# EAGLE board spicboard2 (EAGLE 7.3.0)
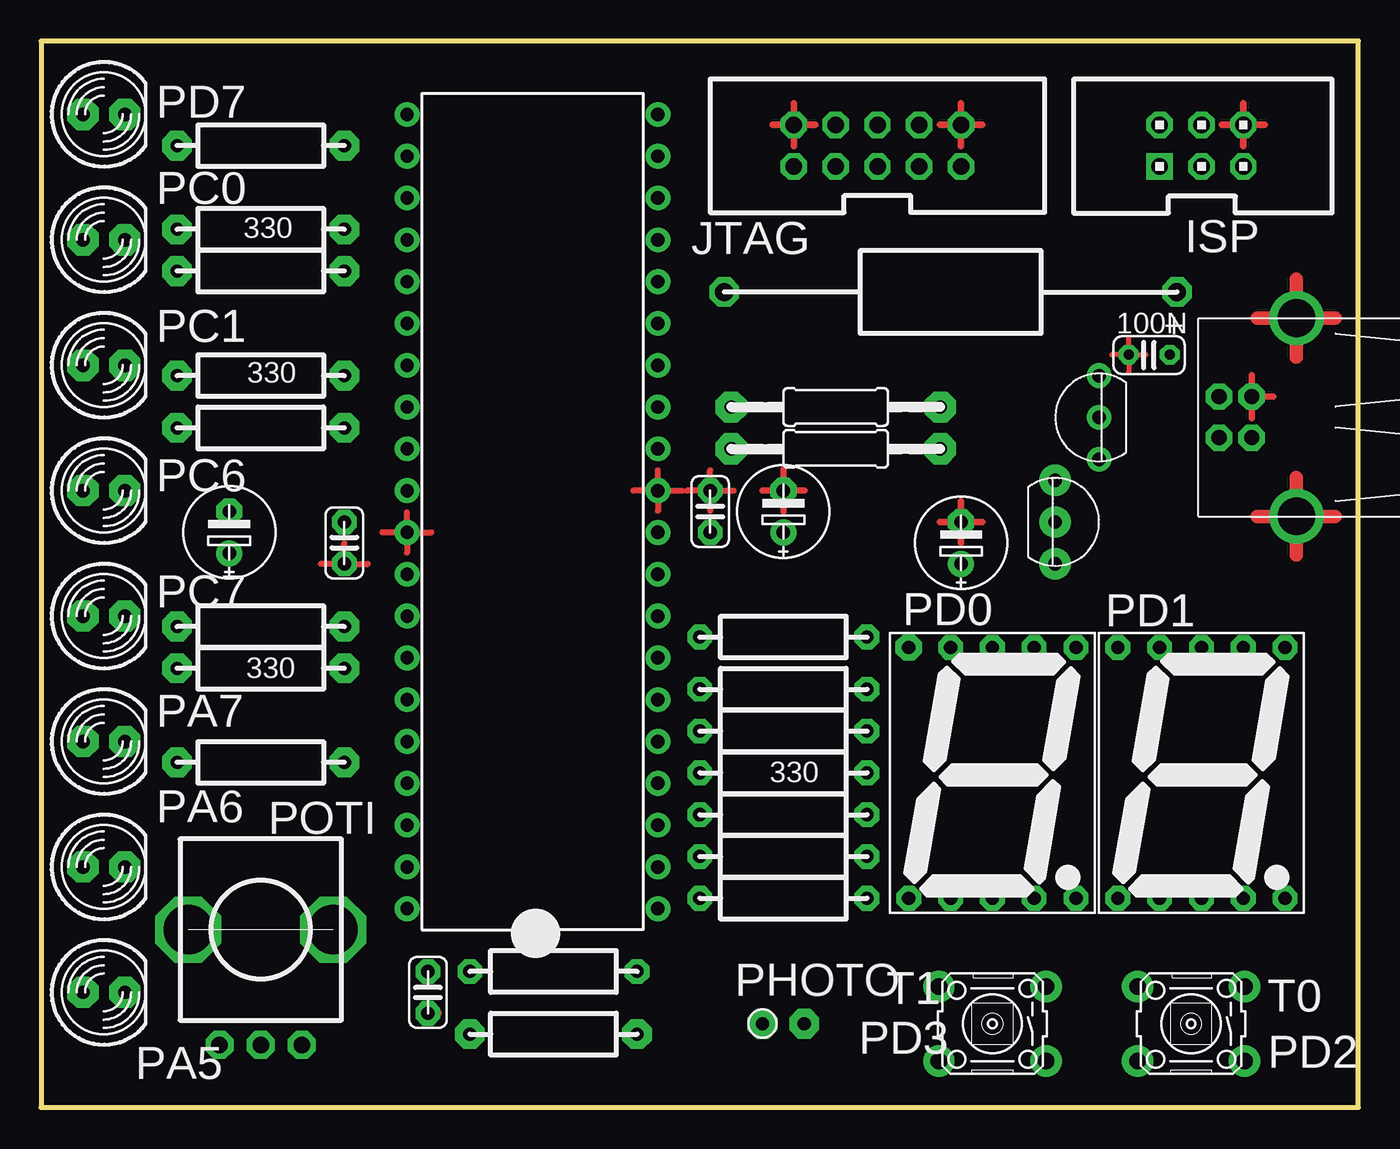
[diagram p0: board, top side]
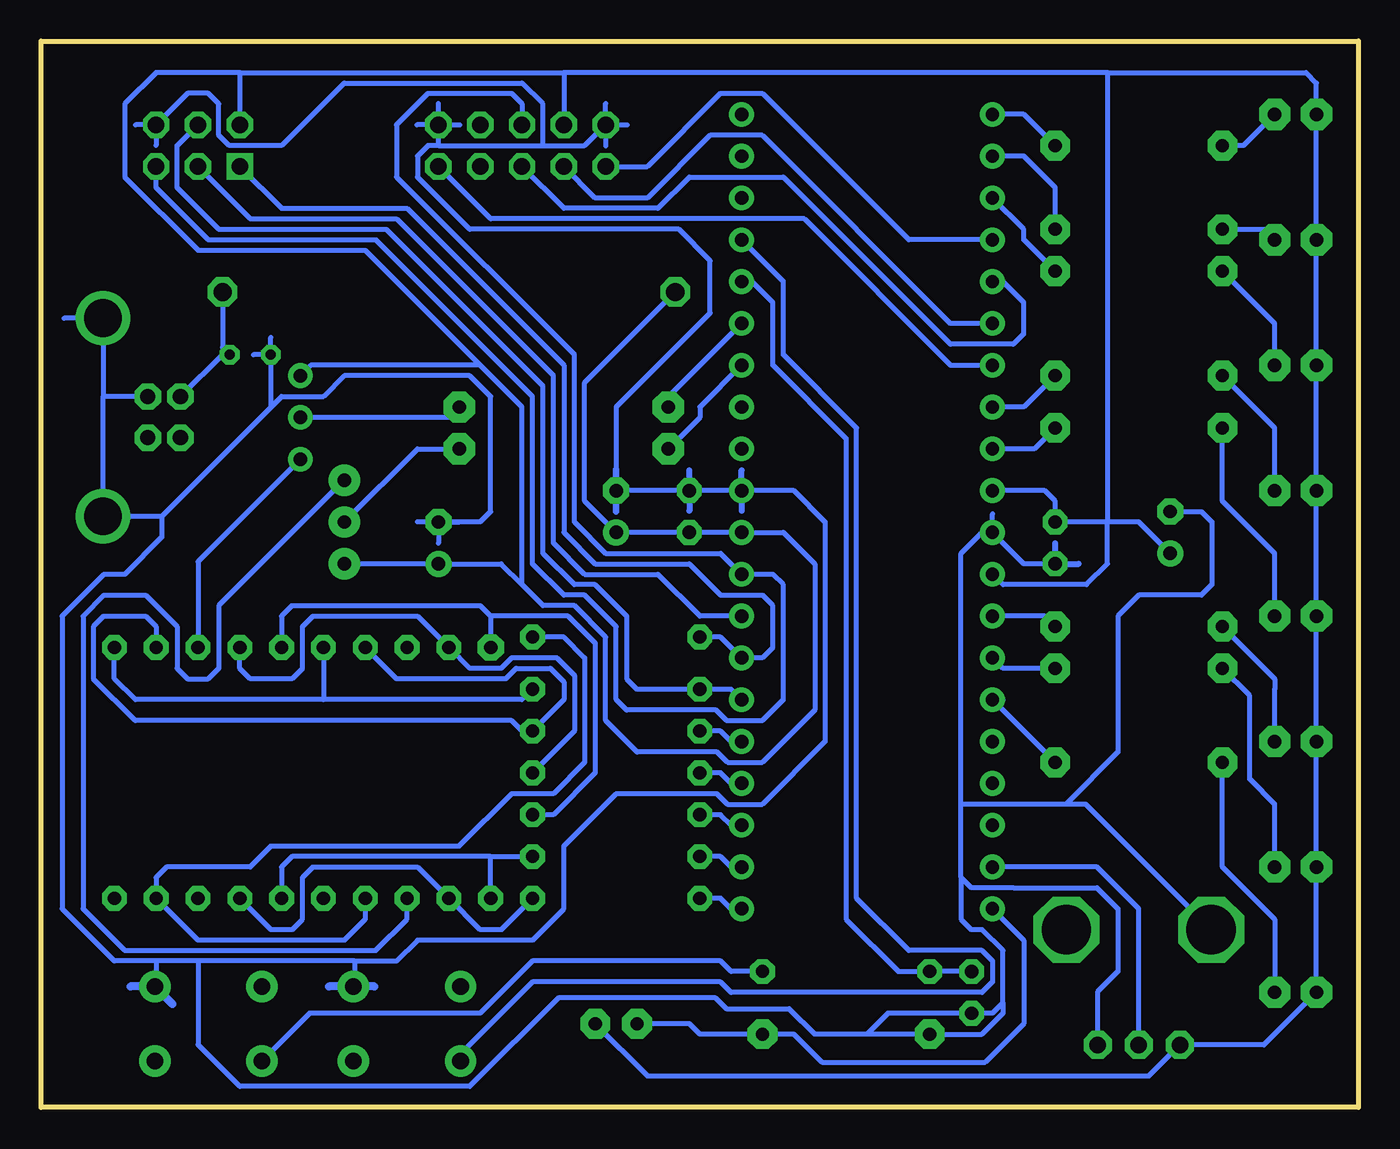
[diagram p1: board, bottom side, seen from below]

Size 80.01 x 64.77 mm. Coordinates in mm from the lower left corner, seen from the top.
Outline: 0,64.77 0,0 80.01,0 80.01,64.77 0,64.77
Copper layers (1*16): Top 0.035mm / dielectric 1.5mm / Bottom 0.035mm
Design rules "TARGET3001!": minimum track width 0.3mm, minimum drill 0.6mm, track to track 0.3mm, track to pad 0.3mm, pad to pad 0.3mm, via to via 0.3mm, smd to smd 0mm, copper to edge 0mm, drill to drill 0.3mm, minimum pad ring 0.3mm, minimum via ring 0.5mm, stop-mask expansion 4mil, vias tented up to drill 0mil, thermal gap 10mil

## Footprints (pad centres in the part's own frame; a part is rotated, then mirrored left to right if it is on the bottom)
#_0 = drill 0.812 pad 1.9 octagon: 1 -1.27,0; 2 1.27,0
#_1 = drill 0.812 pad 1.9 octagon: 1 -1.27,0; 2 1.27,0
#_2 = drill 0.812 pad 1.5 octagon: 1 0,-1.27; 2 0,1.27
D6R2,54_ELKO_66 = drill 0.6 pad 1.2 octagon: 1 1.25,0; 2 -1.25,0
#_3 = drill 0.812 pad 1.574 round: 1 0,-1.27 | drill 0.812 pad 1.574 octagon: 2 0,1.27
#_4 = drill 0.812 pad 1.5 octagon: 1 0,1.27; 2 0,-1.27
#_5 = drill 0.812 pad 1.574 round: 1 0,-1.27 | drill 0.812 pad 1.574 octagon: 2 0,1.27
#_6 = drill 0.812 pad 1.574 round: 1 0,-1.27 | drill 0.812 pad 1.574 octagon: 2 0,1.27
#_7 = drill 0.812 pad 1.5 octagon: 1 0,-1.27; 2 0,1.27
#_8 = drill 0.812 pad 1.5 octagon: 1 -5.08,-7.62; 2 -2.54,-7.62; 3 0,-7.62; 4 2.54,-7.62; 5 5.08,-7.62; 6 5.08,7.62; 7 2.54,7.62; 8 0,7.62; 9 -2.54,7.62 | drill 0.812 pad 1.6 octagon: 10 -5.08,7.62
#_9 = drill 0.812 pad 1.5 octagon: 1 -5.08,-7.62; 2 -2.54,-7.62; 3 0,-7.62; 4 2.54,-7.62; 5 5.08,-7.62; 6 5.08,7.62; 7 2.54,7.62; 8 0,7.62; 9 -2.54,7.62; 10 -5.08,7.62
#_10 = drill 0.812 pad 1.9 octagon: 1 -1.27,0; 2 1.27,0
#_11 = drill 0.812 pad 1.9 octagon: 1 -1.27,0; 2 1.27,0
#_12 = drill 0.812 pad 1.5 round: 1 7.62,-24.13; 2 7.62,-21.59; 3 7.62,-19.05; 4 7.62,-16.51; 5 7.62,-13.97; 6 7.62,-11.43; 7 7.62,-8.89; 8 7.62,-6.35; 9 7.62,-3.81; 10 7.62,-1.27; 11 7.62,1.27; 12 7.62,3.81; 13 7.62,6.35; 14 7.62,8.89; 15 7.62,11.43; 16 7.62,13.97; 17 7.62,16.51; 18 7.62,19.05; 19 7.62,21.59; 20 7.62,24.13; 21 -7.62,24.13; 22 -7.62,21.59; 23 -7.62,19.05; 24 -7.62,16.51; 25 -7.62,13.97; 26 -7.62,11.43; 27 -7.62,8.89; 28 -7.62,6.35; 29 -7.62,3.81; 30 -7.62,1.27; 31 -7.62,-1.27; 32 -7.62,-3.81; 33 -7.62,-6.35; 34 -7.62,-8.89; 35 -7.62,-11.43; 36 -7.62,-13.97; 37 -7.62,-16.51; 38 -7.62,-19.05; 39 -7.62,-21.59; 40 -7.62,-24.13
#_13 = drill 1 pad 1.6 square: 1 -2.54,-1.27 | drill 1 pad 1.6 octagon: 2 -2.54,1.27; 3 0,-1.27; 4 0,1.27; 5 2.54,-1.27; 6 2.54,1.27
#_14 = drill 1 pad 1.6 octagon: 1 -5.08,-1.27; 2 -5.08,1.27; 3 -2.54,-1.27; 4 -2.54,1.27; 5 0,-1.27; 6 0,1.27; 7 2.54,-1.27; 8 2.54,1.27; 9 5.08,-1.27; 10 5.08,1.27
6X19R22,86_61 = drill 1.1 pad 1.8 octagon: 1 13.75,0; 2 -13.75,0
#_15 = drill 0.8 pad 1.8 octagon: 1 0,0; 2 2.54,0
#_16 = drill 0.812 pad 1.9 round: 1 -1.27,0; 2 -1.27,2.54; 3 -1.27,-2.54
#_17 = drill 0.812 pad 1.5 round: 1 1.27,0; 2 1.27,-2.54; 3 1.27,2.54
#_18 = drill 0.8 pad 1.8 octagon: 1 5.08,0; 2 -5.08,0
#_19 = drill 0.8 pad 1.8 octagon: 1 5.08,0; 2 -5.08,0
#_20 = drill 0.8 pad 1.8 octagon: 1 5.08,0; 2 -5.08,0
#_21 = drill 0.8 pad 1.8 octagon: 1 5.08,0; 2 -5.08,0
#_22 = drill 0.8 pad 1.8 octagon: 1 5.08,0; 2 -5.08,0
#_23 = drill 0.8 pad 1.8 octagon: 1 5.08,0; 2 -5.08,0
#_24 = drill 0.8 pad 1.8 octagon: 1 5.08,0; 2 -5.08,0
#_25 = drill 0.8 pad 1.8 octagon: 1 5.08,0; 2 -5.08,0
#_26 = drill 0.8 pad 1.5 octagon: 1 -5.08,0; 2 5.08,0
#_27 = drill 0.8 pad 1.5 octagon: 1 -5.08,0; 2 5.08,0
#_28 = drill 0.8 pad 1.5 octagon: 1 -5.08,0; 2 5.08,0
#_29 = drill 0.8 pad 1.5 octagon: 1 -5.08,0; 2 5.08,0
#_30 = drill 0.8 pad 1.5 octagon: 1 -5.08,0; 2 5.08,0
#_31 = drill 0.8 pad 1.5 octagon: 1 -5.08,0; 2 5.08,0
#_32 = drill 0.8 pad 1.5 octagon: 1 -5.08,0; 2 5.08,0
#_33 = drill 0.812 pad 1.9 octagon: 1 -6.35,0; 2 6.35,0
#_34 = drill 0.812 pad 1.9 octagon: 1 -6.35,0; 2 6.35,0
#_35 = drill 0.8 pad 1.8 octagon: 1 -5.08,0; 2 5.08,0
#_36 = drill 1 pad 1.7 octagon: 1 -2.5,-7; 2 2.5,-7; 3 0,-7 | drill 3 pad 4 octagon: 4 4.4,0; VIA_0 -4.4,0
#_37 = drill 0.8 pad 1.5 octagon: 1 5.08,0; 2 -5.08,0
#_38 = drill 0.812 pad 1.9 octagon: 1 -1.27,0; 2 1.27,0
#_39 = drill 0.812 pad 1.9 octagon: 1 -1.27,0; 2 1.27,0
#_40 = drill 1.016 pad 1.9 round: 1 3.252,-2.261; 2 -3.251,-2.261; 3 3.252,2.26; 4 -3.251,2.26
#_41 = drill 1.016 pad 1.9 round: 1 3.252,-2.261; 2 -3.251,-2.261; 3 3.252,2.26; 4 -3.251,2.26
#_42 = drill 0.914 pad 1.6 octagon: 1 0,-1.25; 2 -1.982,-1.25; 3 0,1.25; 6 -1.982,1.25 | drill 2.286 pad 3.302 round: 4 2.717,-6.02; 5 2.717,6.019
#_43 = drill 0.812 pad 1.9 octagon: 1 -1.27,0; 2 1.27,0
#_44 = drill 0.812 pad 1.9 octagon: 1 -1.27,0; 2 1.27,0

## Placement (x,y rotation side)
BLUE0  #  [#_0]  3.81,37.47 0 top
BLUE1  #  [#_1]  3.81,6.99 0 top
C1  100N  [#_2]  40.64,36.2 0 top
C2  10µF  [D6R2,54_ELKO_66]  67.31,45.72 0 top
C4  10u  [#_3]  11.43,34.92 0 top
C5  100N  [#_4]  23.49,6.99 0 top
C6  10u  [#_5]  45.09,36.2 0 top
C7  10u  [#_6]  55.88,34.29 0 top
C8  100N  [#_7]  18.41,34.29 0 top
DIS1  HD-H101  [#_8]  57.78,20.32 0 top
DIS2  HD-H101  [#_9]  70.48,20.32 0 top
GREEN0  #  [#_10]  3.81,45.09 0 top
GREEN1  #  [#_11]  3.81,14.61 0 top
IC1  MEGA32-P  [#_12]  29.84,36.2 0 top
JP1  AVR-ISP-6  [#_13]  70.48,58.42 0 top
JP2  AVR-JTAG-10  [#_14]  50.8,58.42 0 top
L1  B82132-A5202-M  [6X19R22,86_61]  55.24,49.53 0 top
LDR0  #  [#_15]  43.81,5.08 0 top
Q1  BC557  [#_16]  62.86,35.56 0 top
Q2  BC557  [#_17]  62.99,41.91 0 top
R1  330  [#_18]  13.33,29.21 0 top
R2  330  [#_19]  13.33,26.67 0 top
R3  330  [#_20]  13.33,20.95 0 top
R4  330  [#_21]  13.33,41.28 0 top
R5  330  [#_22]  13.33,44.45 0 top
R6  330  [#_23]  13.33,50.8 0 top
R7  330  [#_24]  13.33,53.34 0 top
R8  330  [#_25]  13.33,58.42 0 top
R9  330  [#_26]  45.09,28.58 0 top
R10  330  [#_27]  45.09,25.4 0 top
R11  330  [#_28]  45.09,22.86 0 top
R12  330  [#_29]  45.09,20.32 0 top
R13  330  [#_30]  45.09,17.78 0 top
R14  330  [#_31]  45.09,15.24 0 top
R15  330  [#_32]  45.09,12.7 0 top
R16  1k  [#_33]  48.26,40 0 top
R17  1k  [#_34]  48.26,42.55 0 top
R18  49,9k  [#_35]  31.12,4.45 0 top
R19  PC16S  [#_36]  13.33,10.79 0 top
R21  1k  [#_37]  31.12,8.26 0 top
RED0  #  [#_38]  3.81,60.33 0 top
RED1  #  [#_39]  3.81,29.84 0 top
S1  #  [#_40]  57.78,5.08 0 top
S2  #  [#_41]  69.85,5.08 0 top
USB1  USB-B-H  [#_42]  73.53,41.93 0 top
YELLOW0  #  [#_43]  3.81,52.7 0 top
YELLOW1  #  [#_44]  3.81,22.23 0 top

## Library data of the parts
BLUE0 BLUE1 C1 C2 C4-C8 DIS1 DIS2 GREEN0 GREEN1 IC1 JP1 JP2 L1 LDR0 Q1 Q2 R1-R19 R21 RED0 RED1 S1 S2 USB1 YELLOW0 YELLOW1 = TARGET3001!_V18.4.0.4

## Nets
(INT0)PD2: R21.1 S2.2
GND: C1.2 C2.2 C4.2 C5.2 C6.2 C7.2 C8.1 IC1.11 IC1.31 JP1.6 JP2.2 JP2.10 R18.1 R19.2 S1.3 S2.3 USB1.3 USB1.4 USB1.5
N$1: IC1.40 LDR0.1 R18.2
N$2: R1.2 YELLOW1.2
N$3: GREEN1.2 R2.2
N$4: BLUE1.2 R3.2
N$5: R4.2 RED1.2
N$6: BLUE0.2 R5.2
N$7: GREEN0.2 R6.2
N$8: R7.2 YELLOW0.2
N$9: R8.2 RED0.2
N$10: IC1.7 JP1.1 R9.1
N$11: IC1.6 JP1.4 R10.1
N$12: IC1.5 R11.1
N$13: IC1.4 R12.1
N$14: IC1.3 R13.1
N$15: IC1.2 R14.1
N$16: IC1.1 R15.1
N$17: IC1.33 R1.1
N$18: IC1.34 R2.1
N$19: IC1.35 R3.1
N$20: IC1.29 R4.1
N$21: IC1.28 R5.1
N$22: IC1.27 JP2.9
N$23: IC1.26 JP2.3
N$24: IC1.25 JP2.5
N$25: DIS1.7 DIS2.7 R11.2
N$26: DIS1.6 DIS2.6 R10.2
N$27: DIS1.4 DIS2.4 R9.2
N$28: DIS1.2 DIS2.2 R15.2
N$29: DIS1.1 DIS2.1 R14.2
N$30: IC1.24 JP2.1
N$31: DIS1.10 DIS2.10 R13.2
N$34: IC1.14 R16.1
N$35: IC1.15 R17.1
N$36: Q1.1 R16.2
N$37: Q2.1 R17.2
N$38: IC1.21 R8.1
N$39: IC1.17 S1.2
N$40: IC1.39 R19.3
N$41: DIS1.9 DIS2.9 R12.2
N$42: IC1.8 JP1.3
N$43: C5.1 IC1.16 R21.2
N$44: IC1.9 JP1.5 JP2.6
N$46: IC1.22 R7.1
N$47: IC1.23 R6.1
Sig$47: DIS1.3 Q1.2
Sig$48: DIS2.8 Q2.2
VBUS: C2.1 L1.1 USB1.6
VCC: BLUE0.1 BLUE1.1 C1.1 C4.1 C6.1 C7.1 C8.2 GREEN0.1 GREEN1.1 IC1.10 IC1.30 IC1.32 JP1.2 JP2.4 L1.2 LDR0.2 Q1.3 Q2.3 R19.1 RED0.1 RED1.1 YELLOW0.1 YELLOW1.1

## Tracks (layer width: path | path; a pad name or v marks a point on that pad's centre or on a via)
(INT0)PD2
  Bottom 0.3: S2.2 63.7,5.71 53.34,5.71 50.16,8.89 38.73,8.89 38.1,8.26 R21.1
GND
  Top 0.3: C2.2 67.11,45.72 | C2.2 66.06,46.77 | C2.2 65.01,45.72 | C2.2 66.06,44.67
  Top 0.375: C1.2 42.08,37.47 | C1.2 40.64,38.7 | C1.2 39.2,37.47 | C1.2 40.64,36.23 | C5.2 24.16,5.71 | C8.1 19.85,33.02 | C8.1 18.41,34.26 | C8.1 16.98,33.02 | IC1.31 23.71,34.92 | IC1.31 22.23,36.16 | IC1.31 20.74,34.92 | IC1.31 22.23,33.69 | IC1.11 38.95,37.47 | IC1.11 37.46,38.7 | IC1.11 35.98,37.47 | IC1.11 37.46,36.23
  Top 0.394: C6.2 46.37,37.47 | C6.2 45.09,38.75 | C6.2 43.8,37.47 | C6.2 45.09,36.18 | C7.2 57.16,35.56 | C7.2 55.88,36.84 | C7.2 54.6,35.56 | C7.2 55.88,34.28
  Top 0.4: USB1.3 74.83,43.18 | USB1.3 73.53,44.48 | USB1.3 73.53,41.88 | JP1.6 74.33,59.69 | JP1.6 73.03,60.99 | JP1.6 71.72,59.69 | JP1.6 73.03,58.39 | JP2.2 47.02,59.69 | JP2.2 45.72,60.99 | JP2.2 44.42,59.69 | JP2.2 45.72,58.39 | JP2.10 57.18,59.69 | JP2.10 55.88,60.99 | JP2.10 54.58,59.69 | JP2.10 55.88,58.39
  Top 0.425: R18.1 26.58,4.45
  Top 0.475: S1.3 61.25,7.34 | S2.3 73.32,7.34
  Top 0.826: USB1.4 78.61,35.91 | USB1.4 76.25,38.27 | USB1.4 73.89,35.91 | USB1.4 76.25,33.54 | USB1.5 78.61,47.95 | USB1.5 76.25,50.31 | USB1.5 73.89,47.95 | USB1.5 76.25,45.58
  Bottom 0.3: C8.1 20.32,33.02 IC1.31 | IC1.31 22.86,34.92 24.13,33.66 24.13,18.41 | USB1.3 76.25,43.18 | USB1.3 73.66,43.18 USB1.3 | 76.25,43.18 USB1.5 78.61,47.95 | 66.04,42.55 65.41,43.18 62.86,43.18 61.59,44.45 53.97,44.45 52.7,43.18 52.7,36.2 53.34,35.56 C7.2 | JP2.2 46.99,58.42 49.53,58.42 | 55.88,58.42 49.53,58.42 | 55.88,58.42 JP2.10 | JP1.6 71.12,61.59 69.85,61.59 69.22,60.96 69.22,59.06 68.58,58.42 65.41,58.42 61.59,62.23 50.8,62.23 49.53,60.96 49.53,58.42 | 60.96,8.89 70.48,8.89 | C7.2 57.16,35.56 | C7.2 54.6,35.56 | C7.2 55.88,34.28 | IC1.31 22.23,36.05 | JP1.6 74.28,59.69 | JP1.6 73.03,58.44 | JP2.2 45.72,60.99 | JP2.2 44.42,59.69 | JP2.2 45.72,58.39 | JP2.10 57.18,59.69 | JP2.10 55.88,60.99 | JP2.10 54.58,59.69 | 55.88,58.42 56.52,58.42 57.15,57.78 57.15,56.52 53.97,53.34 41.27,53.34 39.37,51.44 39.37,48.26 45.09,42.55 C6.2 C1.2 IC1.11 34.29,37.47 32.38,35.56 32.38,22.23 36.2,18.41 38.33,18.41 38.97,19.05 45.09,19.05 48.26,15.88 48.26,12.07 50.16,10.16 57.15,10.16 58.42,8.89 60.96,8.89 | 66.04,42.55 66.04,45.7 C2.2 | 73.03,8.89 73.03,7.42 S2.3 | 60.96,8.89 60.96,7.42 S1.3 | 24.13,13.97 24.13,18.41 | 24.13,13.97 23.49,13.34 20.95,13.34 15.88,13.34 14.6,12.07 14.6,8.26 15.85,7.01 15.85,3.81 R19.2 | 17.78,18.41 14.6,21.59 14.6,29.84 13.33,31.12 9.53,31.12 8.89,31.75 8.89,35.56 9.53,36.2 C4.2 | 17.78,18.41 24.13,18.41 | 66.04,42.55 72.68,35.91 | 72.68,35.91 USB1.4 76.25,43.18 | 73.03,8.89 75.56,8.89 78.74,12.07 78.74,29.84 76.2,32.39 74.93,32.39 72.68,34.64 72.68,35.91 | 70.48,8.89 70.48,3.81 67.94,1.27 53.97,1.27 48.59,6.65 39.04,6.65 38.38,6 34.57,6 33.02,4.45 29.84,4.45 | 70.48,8.89 73.03,8.89
  Bottom 0.3: 24.13,13.97 24.13,11.43 23.49,10.79 22.86,10.79 21.59,9.53 21.59,6.35 | 8.94,10.79 16.55,18.41 17.78,18.41 | C2.2 67.11,45.72 | C2.2 66.06,46.77 | 21.59,6.35 22.23,5.71 C5.2 28.57,5.71 29.84,4.45 | 29.84,4.45 R18.1 22.86,4.45 21.59,5.71 21.59,6.35
  Bottom 0.375: 40.64,38.7 C1.2 40.64,36.23 | 18.41,34.26 C8.1 16.98,33.02 | 37.46,38.7 IC1.11 37.46,36.23
  Bottom 0.394: 45.09,38.75 C6.2 45.09,36.18
  Bottom 0.475: 74.59,7.34 S2.3 72.05,6.29 | 59.77,7.34 S1.3 62.52,7.34
N$1
  Bottom 0.3: IC1.40 20.32,10.16 20.32,5.08 22.66,2.74 32.59,2.74 34.29,4.45 R18.2 39.37,4.45 40,4.45 40.64,5.08 LDR0.1
N$2
  Bottom 0.3: YELLOW1.2 5.08,25.4 5.08,26.04 5.72,26.67 R1.2
N$3
  Bottom 0.3: GREEN1.2 5.08,18.41 6.6,19.94 6.6,23.75 6.6,25.02 R2.2
N$4
  Bottom 0.3: BLUE1.2 5.08,11.43 8.25,14.61 R3.2
N$5
  Bottom 0.3: RED1.2 5.08,33.66 8.25,36.83 R4.2
N$6
  Bottom 0.3: BLUE0.2 5.08,41.28 R5.2
N$7
  Bottom 0.3: GREEN0.2 5.08,47.62 R6.2
N$8
  Bottom 0.3: R7.2 6.35,53.34 5.72,53.34 YELLOW0.2
N$9
  Bottom 0.3: RED0.2 6.98,58.42 R8.2
N$10
  Bottom 0.3: JP1.1 65.41,54.61 57.78,54.61 48.26,45.09 48.26,34.92 46.36,33.02 40.64,33.02 38.73,31.12 36.2,31.12 35.56,30.48 35.56,27.94 36.2,27.3 IC1.7 38.73,28.58 R9.1
N$11
  Bottom 0.3: JP1.4 71.75,58.42 71.75,55.88 69.22,53.34 59.05,53.34 49.53,43.81 49.53,33.66 47.62,31.75 46.36,31.75 44.45,29.84 44.45,26.04 43.81,25.4 R10.1 38.1,25.4 IC1.6
N$12
  Bottom 0.3: IC1.5 38.1,22.23 38.73,22.86 R11.1
N$13
  Bottom 0.3: IC1.4 38.1,19.69 38.73,20.32 R12.1
N$14
  Bottom 0.3: IC1.3 38.1,17.14 38.73,17.78 R13.1
N$15
  Bottom 0.3: IC1.2 38.1,14.61 38.73,15.24 R14.1
N$16
  Bottom 0.3: IC1.1 38.1,12.07 38.73,12.7 R15.1
N$17
  Bottom 0.3: R1.1 19.05,29.84 IC1.33
N$18
  Bottom 0.3: R2.1 20.32,26.67 21.59,26.67 IC1.34
N$19
  Bottom 0.3: 21.59,24.77 IC1.35 R3.1
N$20
  Bottom 0.3: 21.84,39.62 IC1.29 19.69,40 R4.1
N$21
  Bottom 0.3: R5.1 20.32,42.55 IC1.28
N$22
  Bottom 0.3: IC1.27 24.77,45.09 33.66,53.97 52.7,53.97 JP2.9
N$23
  Bottom 0.3: IC1.26 24.77,47.62 36.2,59.06 39.37,59.06 43.18,55.25 46.36,55.25 JP2.3
N$24
  Bottom 0.3: IC1.25 21.59,50.17 20.32,48.89 20.32,46.99 20.95,46.36 24.77,46.36 34.92,56.52 40.64,56.52 42.55,54.61 48.26,54.61 JP2.5
N$25
  Bottom 0.3: DIS2.7 73.03,29.21 73.66,29.84 76.2,29.84 76.83,29.21 76.83,26.04 74.3,23.5 51.44,23.5 50.8,22.86 R11.2 48.26,24.77 48.26,25.85 49.08,26.67 51.16,26.67 51.79,26.04 58.42,26.04 DIS1.7
N$26
  Bottom 0.3: DIS1.6 62.86,24.77 | 62.86,24.77 74.3,24.77 75.56,26.04 DIS2.6 | R10.2 50.8,24.77 62.86,24.77
N$27
  Bottom 0.3: R9.2 48.26,28.58 46.99,27.3 46.99,20.95 48.89,19.05 51.44,19.05 54.61,15.88 66.04,15.88 67.31,14.61 72.39,14.61 73.03,13.97 DIS2.4 70.48,10.16 61.59,10.16 60.33,11.43 DIS1.4
N$28
  Bottom 0.3: R15.2 52.07,10.79 53.34,10.79 DIS1.2 57.15,14.61 63.5,14.61 64.13,13.97 64.13,11.43 64.77,10.79 66.04,10.79 DIS2.2
N$29
  Bottom 0.3: 52.7,15.24 64.77,15.24 65.41,14.61 DIS2.1 | DIS1.1 52.7,15.24 | 52.7,15.24 R14.2
N$30
  Bottom 0.3: IC1.24 27.3,52.7 36.2,61.59 38.73,61.59 43.18,57.15 JP2.1
N$31
  Bottom 0.3: 52.7,29.84 DIS1.10 | DIS2.10 65.41,29.84 64.77,30.48 53.34,30.48 52.7,29.84 | 52.7,29.84 48,29.84 46.36,28.2 46.36,20.32 48.89,17.78 R13.2
N$34
  Bottom 0.3: IC1.14 40,42.55 40,41.91 R16.1
N$35
  Bottom 0.3: IC1.15 41.91,43.18 R17.1
N$36
  Bottom 0.3: R16.2 57.15,40 Q1.1
N$37
  Bottom 0.3: R17.2 55.24,41.91 Q2.1
N$38
  Bottom 0.3: R8.1 20.32,60.33 IC1.21
N$39
  Bottom 0.3: IC1.17 34.92,50.17 34.92,45.72 30.48,41.28 30.48,12.7 27.3,9.53 22.86,9.53 22.23,8.89 22.23,7.62 22.86,6.99 38.1,6.99 38.73,7.62 50.16,7.62 54.53,3.25 S1.2
N$40
  Bottom 0.3: R19.3 13.33,12.07 15.88,14.61 IC1.39
N$41
  Bottom 0.3: DIS2.9 67.94,26.67 67.31,26.04 64.77,26.04 64.13,26.67 64.13,29.21 63.5,29.84 57.15,29.84 DIS1.9 53.97,26.67 52.07,26.67 51.44,27.3 48.68,27.3 47.62,26.25 47.62,22.86 R12.2
N$42
  Bottom 0.3: JP1.3 67.31,53.97 58.42,53.97 48.89,44.45 48.89,34.29 46.99,32.39 42.55,32.39 40,29.84 IC1.8
N$43
  Bottom 0.3: IC1.16 36.83,50.17 35.56,48.89 35.56,45.09 31.12,40.64 31.12,11.43 27.94,8.26 R21.2 C5.1
N$44
  Bottom 0.3: JP2.6 50.8,60.96 51.44,61.59 56.52,61.59 58.42,59.69 58.42,56.52 47.62,45.72 47.62,35.56 45.72,33.66 38.73,33.66 IC1.9 35.56,32.39 34.92,31.75 34.92,24.77 36.2,23.5 38.37,23.5 39,24.13 44.45,24.13 45.09,24.77 45.09,29.21 46.99,31.12 48.26,31.12 50.16,33.02 50.16,43.18 59.69,52.7 69.85,52.7 73.03,55.88 JP1.5
N$46
  Bottom 0.3: 21.59,57.78 IC1.22 20.32,57.78 18.41,55.88 R7.1
N$47
  Bottom 0.3: R6.1 20.32,52.7 20.32,53.34 IC1.23
Sig$47
  Bottom 0.3: DIS1.3 57.78,11.43 59.69,9.53 74.93,9.53 77.47,12.07 77.47,29.84 76.2,31.12 73.66,31.12 71.75,29.21 71.75,26.67 71.12,26.04 69.85,26.04 69.22,26.67 69.22,30.48 Q1.2
Sig$48
  Bottom 0.3: Q2.2 70.48,33.15 DIS2.8
VBUS
  Bottom 0.3: L1.1 69,46.16 | 69,46.16 C2.1 | USB1.6 69,45.73 69,46.16
VCC
  Bottom 0.3: IC1.30 19.05,37.47 18.41,36.83 C8.2 15.24,35.56 | 15.24,62.86 3.17,62.86 2.54,62.23 RED0.1 YELLOW0.1 GREEN0.1 BLUE0.1 RED1.1 YELLOW1.1 GREEN1.1 BLUE1.1 5.73,3.79 R19.1 12.72,1.91 43.18,1.91 LDR0.2 | 67.94,62.86 JP1.2 | 15.24,62.86 15.24,35.56 | 15.24,62.86 48.26,62.86 | 67.94,62.86 73.03,62.86 74.93,60.96 74.93,56.52 70.48,52.07 60.33,52.07 53.34,45.09 | 50.8,31.75 50.8,42.55 53.34,45.09 | Q1.3 C7.1 52.07,33.02 50.8,31.75 | 48.26,62.86 JP2.4 | 67.94,62.86 48.26,62.86 | L1.2 46.99,44.03 46.99,36.83 C6.1 C1.1 IC1.10 34.92,34.92 33.02,33.02 33.02,24.13 36.2,20.95 38.31,20.95 38.95,21.59 43.81,21.59 45.72,23.5 45.72,28.58 47.62,30.48 49.53,30.48 50.8,31.75 | 53.34,45.09 63.63,45.09 Q2.3 | 15.24,35.56 15.24,33.02 16.51,31.75 21.59,31.75 IC1.32 | C4.1 13.33,35.56 15.24,35.56

## Text on the board
tPlace: PD7 | PC0 | 330 | JTAG | ISP | PC1 | 100N | 330 | PC6 | PC7 | PD0 | PD1 | 330 | PA7 | 330 | PA6 | POTI | PHOTO | T1 | T0 | PD3 | PD2 | PA5